# Altium PCB 核心板.PcbDoc
Units mm, origin at the board's own origin, x right, y up, seen from the top; angles counter-clockwise.
Board outline 56.5 x 81 mm, 2 copper layers (Top Layer, Bottom Layer); 12 components, 45 nets, 149 pads, 10 vias.
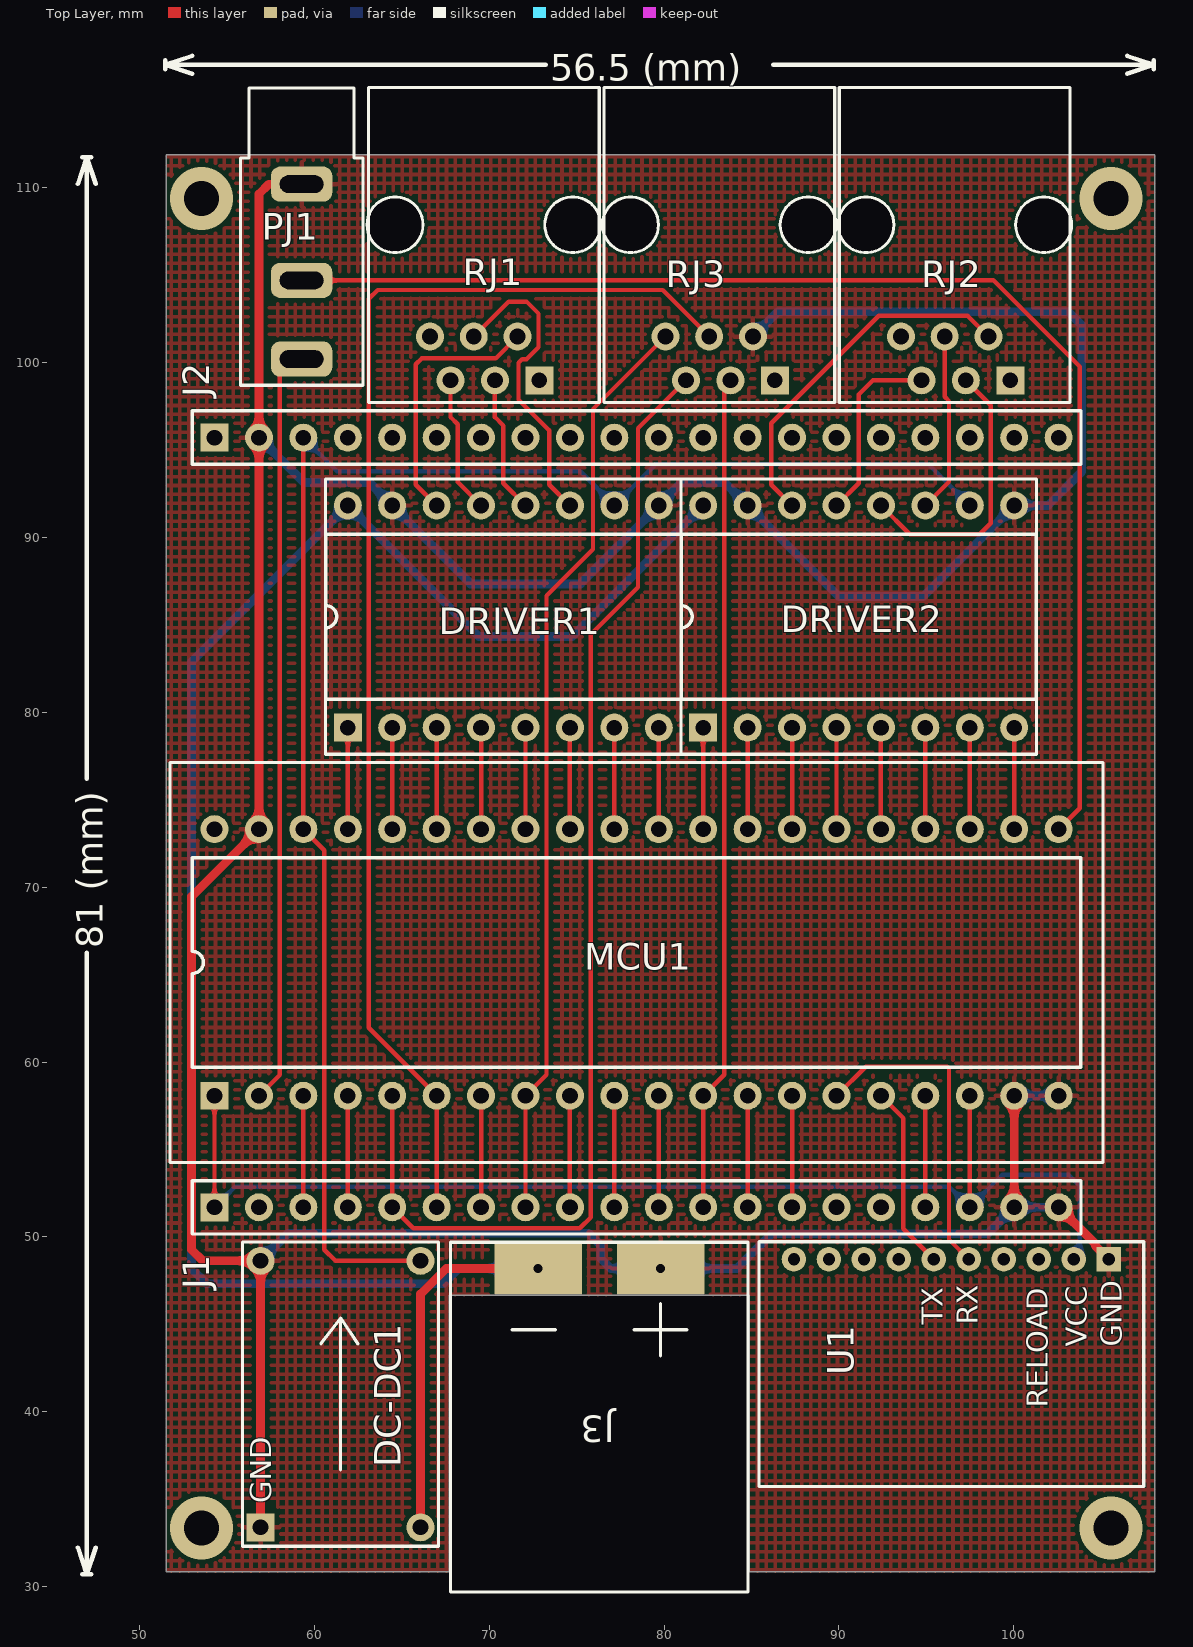
[diagram p0: Top Layer view]
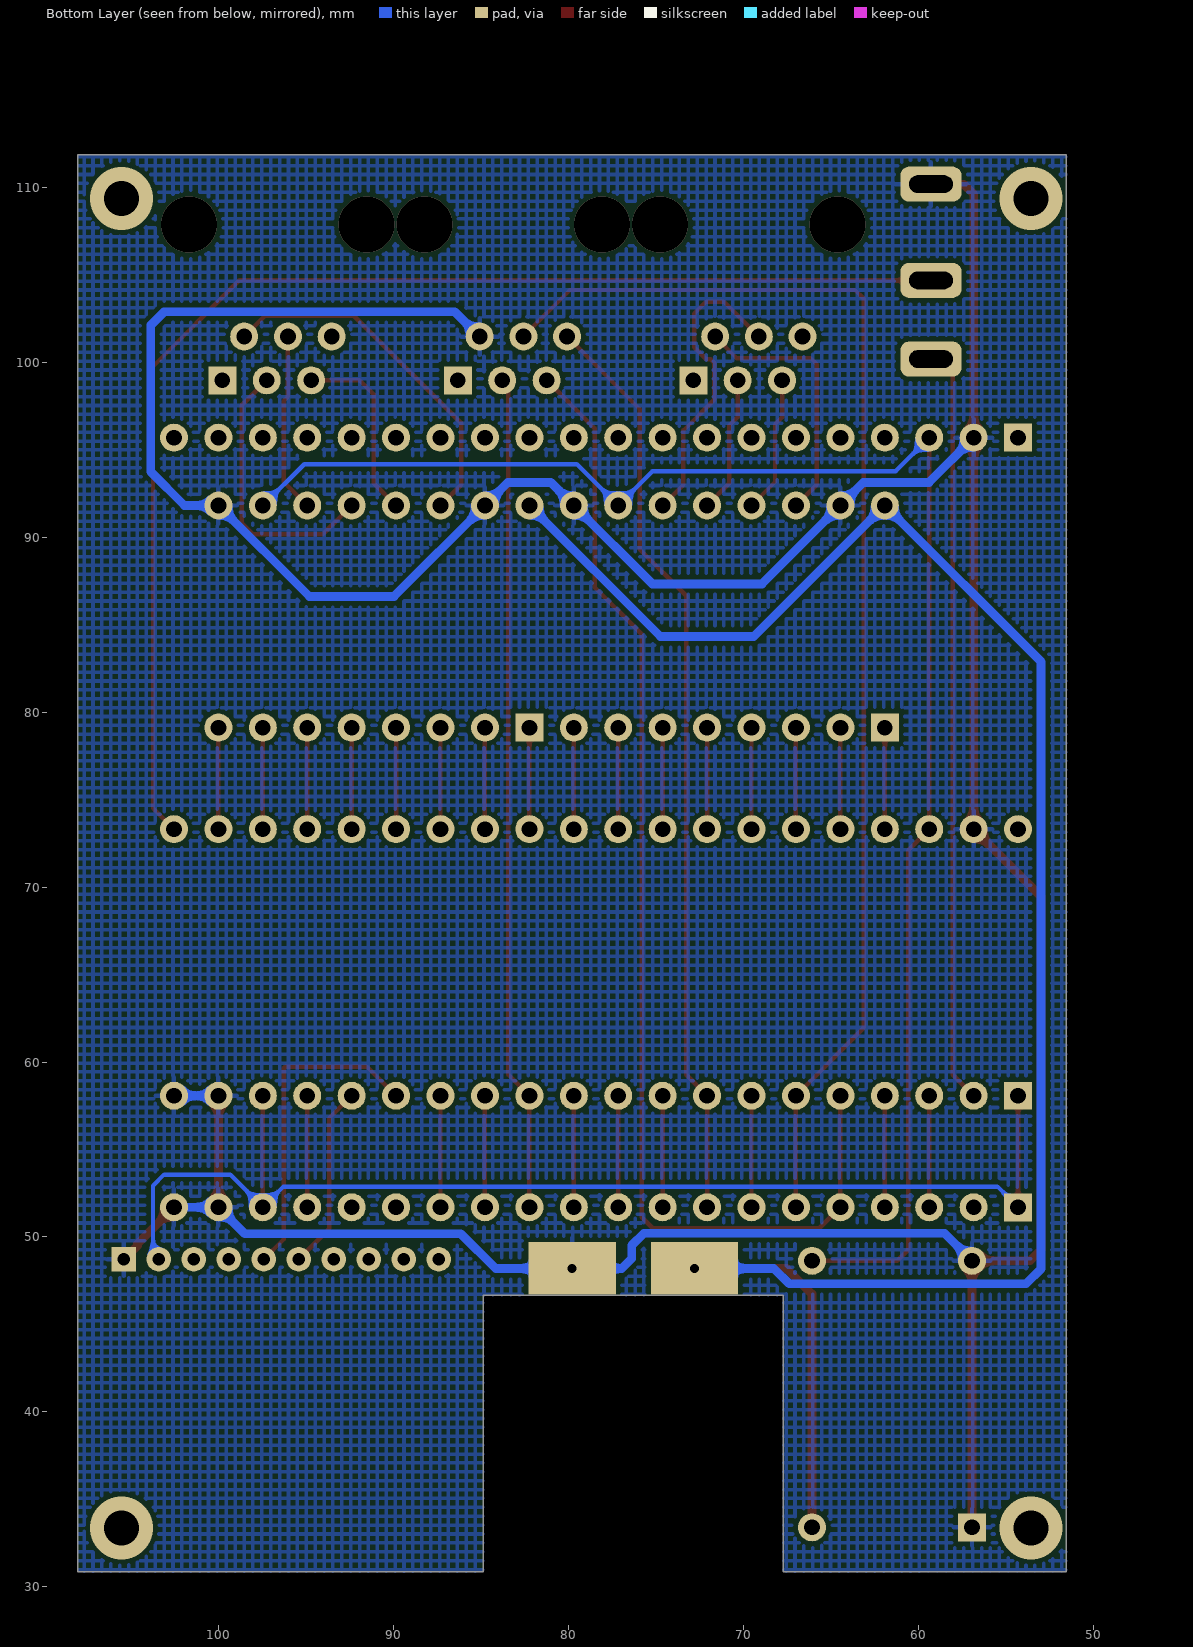
[diagram p1: Bottom Layer view, seen from below]

## Layer stack, top to bottom
Top Solder: solder mask 0.0102, Solder Resist, Dk 3.5
Top Layer: signal copper 0.0356
Dielectric 1: dielectric 0.32, FR-4, Dk 4.8
Bottom Layer: signal copper 0.0356
Bottom Solder: solder mask 0.0102, Solder Resist, Dk 3.5

## Board outline
51.55,30.875 51.55,111.875 108.05,111.875 108.05,30.875 84.875,30.875 84.875,46.675 67.725,46.675 67.725,30.875

## Design rules (kind name [scope] priority, off if disabled: settings)
Clearance [All] p1: gap=0.254
PolygonConnect [All] p1: connectstyle=Relief reliefconductorwidth=0.254 reliefentries=4 polygonreliefangle="90 Angle" airgapwidth=0.254
RoutingVias [All] p1: holewidth=0.711 width=1.27 viastyle="Through Hole" minholewidth=0.711 minwidth=1.27 maxholewidth=0.711 maxwidth=1.27
SolderMaskExpansion [All] p1: expansion=0.102
Width Width_3 [InNet('NetDC-DC1_2')] p1: maxlimit=0.5 minlimit=0.5 preferedwidth=0.5
Width Width_2 [InNet('GND')] p2: maxlimit=0.5 minlimit=0.5 preferedwidth=0.5
Width Width_1 [InNet('GND')] p3: maxlimit=0.5 minlimit=0.5 preferedwidth=0.5
Width [InNet('NetDC-DC1_1')] p4: maxlimit=0.5 minlimit=0.5 preferedwidth=0.5
30 further rules are at their usual default settings.

## Components (designator, comment, footprint, x,y, rotation, side; value= is the part's Value field where it differs from the comment)
DC-DC1 "MINI360稳压模块" MINI360 61.508,41.02 r90 top
DRIVER1 "TMC2100步进电机驱动" DIP16 61.92,79.121 r90 top
DRIVER2 "TMC2100步进电机驱动" DIP16 82.24,79.121 r90 top
J1 "20脚排插" SIP20 54.3,51.7 r90 top
J2 "20脚排插" SIP20 54.3,95.7 r90 top
J3 "XT60插座" XT60 76.3,39.7 r180 top
MCU1 "STM32C8T6最小系统" DIP40 54.3,58.075 r90 top
PJ1 "PJ_316" PJ_316 59.282,104.692 r0 top
RJ1 "RJ12插座" RJ12 72.871,98.977 r180 top
RJ2 "RJ12插座" RJ12 99.795,98.977 r180 top
RJ3 "RJ12插座" RJ12 86.333,98.977 r180 top
U1 "USR-C215" USR_C215 96.425,42.725 r90 top

## Footprints (in the part's own frame and the unit in brackets; to place one, negate y for a bottom-side part, rotate by r counter-clockwise, add the part's x,y. Pads: shape width x height; smd on the part's side, far side on the other; paste and mask are expansions set on the pad)
DIP16 [mm]
  rect 1.6x1.6 hole 0.9: 1(0,0)
  round 1.6 hole 0.9: 2(0,-2.54) 3(0,-5.08) 4(0,-7.62) 5(0,-10.16) 6(0,-12.7) 7(0,-15.24) 8(0,-17.78) 9(12.7,-17.78) 10(12.7,-15.24) 11(12.7,-12.7) 12(12.7,-10.16) 13(12.7,-7.62) 14(12.7,-5.08) 15(12.7,-2.54) 16(12.7,0)
  silkscreen extent -1.52,-19.05 14.22,1.27
DIP40 [mm]
  rect 1.6x1.6 hole 0.9: 1(0,0)
  round 1.6 hole 0.9: 2(0,-2.54) 3(0,-5.08) 4(0,-7.62) 5(0,-10.16) 6(0,-12.7) 7(0,-15.24) 8(0,-17.78) 9(0,-20.32) 10(0,-22.86) 11(0,-25.4) 12(0,-27.94) 13(0,-30.48) 14(0,-33.02) 15(0,-35.56) 16(0,-38.1) 17(0,-40.64) 18(0,-43.18) 19(0,-45.72) 20(0,-48.26) 21(15.24,-48.26) 22(15.24,-45.72) 23(15.24,-43.18) 24(15.24,-40.64) 25(15.24,-38.1) 26(15.24,-35.56) 27(15.24,-33.02) 28(15.24,-30.48) 29(15.24,-27.94) 30(15.24,-25.4) 31(15.24,-22.86) 32(15.24,-20.32) 33(15.24,-17.78) 34(15.24,-15.24) 35(15.24,-12.7) 36(15.24,-10.16) 37(15.24,-7.62) 38(15.24,-5.08) 39(15.24,-2.54) 40(15.24,0)
  silkscreen extent -3.81,-50.8 19.05,2.54
MINI360 [mm]
  rect 1.6x1.6 hole 0.9: 1(-7.62,4.572)
  round 1.6 hole 0.9: 2(-7.62,-4.572) 3(7.62,-4.572) 4(7.62,4.572)
  silkscreen extent -8.7,-5.6 8.7,5.6
PJ_316 [mm]
  rrect50% 3.5x2 hole 1 slot 2.5 at 0 deg: 1(0,5.5) 2(0,0) 3(0,-4.5)
  silkscreen extent -3.5,-6 3.5,11
RJ12 [mm]
  rect 1.6x1.6 hole 0.9: 1(0,0)
  round 1.6 hole 0.9: 2(1.25,-2.5) 3(2.54,0) 4(3.75,-2.5) 5(5.08,0) 6(6.25,-2.5)
  silkscreen extent -3.51,-16.74 9.85,1.26
SIP20 [mm]
  rect 1.6x1.6 hole 0.9: 1(0,0)
  round 1.6 hole 0.9: 2(0,-2.54) 3(0,-5.08) 4(0,-7.62) 5(0,-10.16) 6(0,-12.7) 7(0,-15.24) 8(0,-17.78) 9(0,-20.32) 10(0,-22.86) 11(0,-25.4) 12(0,-27.94) 13(0,-30.48) 14(0,-33.02) 15(0,-35.56) 16(0,-38.1) 17(0,-40.64) 18(0,-43.18) 19(0,-45.72) 20(0,-48.26)
  silkscreen extent -1.52,-49.53 1.52,1.27
USR_C215 [mm]
  rect 1.4x1.4 hole 0.7: 1(6,-9)
  round 1.4 hole 0.7: 2(6,-7) 3(6,-5) 4(6,-3) 5(6,-1) 6(6,1) 7(6,3) 8(6,5) 9(6,7) 10(6,9)
  silkscreen extent -7,-11 7,11
XT60 [mm]
  rect 5x3 hole 0.5: 1(-3.5,-8.5) 2(3.5,-8.5)
  silkscreen extent -8.5,-10 8.5,10

## Via types
v1: diameter 3.2, hole 3.2, Top Layer to Bottom Layer, 6 vias
v2: diameter 3.6, hole 2, Top Layer to Bottom Layer, 4 vias

## Nets (pads, with @x,y where several pads share a name; then routed paths per layer and width w, separated by ;. In a path a pad name is that pad's centre, name@x,y a point inside that pad or via, vN(x,y) a via of type N, cw(c..) or ccw(c..) an arc to the next point about the centre after c; other vN are vias at no path point)
GND: DC-DC1.1 DC-DC1.4 DRIVER1.9 DRIVER1.15 DRIVER2.9 DRIVER2.15 J1.19 J1.20 J2.2 J3.1 MCU1.19 MCU1.20 MCU1.39 PJ1.1 RJ3.2 U1.1 | length 232.8
  Top Layer w0.5: DC-DC1.1 DC-DC1.4 53.62,48.64 52.984,49.276 52.984,69.459 MCU1.39 J2.2 56.84,109.628 57.404,110.192 PJ1.1 ; J1.19 MCU1.19 ; J1.20 104.648,49.612 104.648,49.502 U1.1
  Bottom Layer w0.5: J2.2 59.398,93.142 63.139,93.142 DRIVER1.15 68.942,87.339 75.218,87.339 DRIVER1.9 81.021,93.142 83.459,93.142 DRIVER2.15 89.987,86.614 94.813,86.614 DRIVER2.9 101.956,91.821 103.886,93.751 103.886,102.133 103.124,102.895 86.501,102.895 RJ3.2 ; DC-DC1.4 58.512,50.216 75.692,50.216 76.387,49.521 76.387,48.768 76.955,48.2 J3.1 84.166,48.2 86.157,50.19 98.51,50.19 J1.19 J1.20 ; MCU1.19 MCU1.20
NetDC-DC1_2: DC-DC1.2 DRIVER1.16 DRIVER2.16 J3.2 | length 115.1
  Top Layer w0.5: DC-DC1.2 66.08,46.736 67.544,48.2 J3.2
  Bottom Layer w0.5: J3.2 68.266,48.2 67.386,47.32 53.848,47.32 52.984,48.184 52.984,82.885 DRIVER1.16 69.413,84.328 74.747,84.328 DRIVER2.16
NetDC-DC1_3: DC-DC1.3 DRIVER1.10 DRIVER2.10 J2.3 MCU1.38 | length 94.3
  Top Layer w0.254: J2.3 MCU1.38 60.579,72.116 60.579,49.276 61.215,48.64 DC-DC1.3
  Bottom Layer w0.254: J2.3 61.303,93.777 75.204,93.777 DRIVER1.10 79.522,94.183 95.118,94.183 DRIVER2.10
NetDRIVER1_1: DRIVER1.1 MCU1.37 | length 5.8
  Top Layer w0.254: MCU1.37 DRIVER1.1
NetDRIVER1_2: DRIVER1.2 MCU1.36 | length 5.8
  Top Layer w0.254: MCU1.36 DRIVER1.2
NetDRIVER1_3: DRIVER1.3 MCU1.35 | length 5.8
  Top Layer w0.254: MCU1.35 DRIVER1.3
NetDRIVER1_4: DRIVER1.4 MCU1.34 | length 5.8
  Top Layer w0.254: MCU1.34 DRIVER1.4
NetDRIVER1_5: DRIVER1.5 MCU1.33 | length 5.8
  Top Layer w0.254: MCU1.33 DRIVER1.5
NetDRIVER1_6: DRIVER1.6 MCU1.32 | length 5.8
  Top Layer w0.254: MCU1.32 DRIVER1.6
NetDRIVER1_7: DRIVER1.7 MCU1.31 | length 5.8
  Top Layer w0.254: MCU1.31 DRIVER1.7
NetDRIVER1_8: DRIVER1.8 MCU1.30 | length 5.8
  Top Layer w0.254: MCU1.30 DRIVER1.8
NetDRIVER1_11: DRIVER1.11 RJ1.4 | length 17.6
  Top Layer w0.254: RJ1.4 71.124,103.48 72.136,103.48 72.822,102.794 72.822,100.863 72.136,100.178 71.882,100.178 71.679,99.974 71.679,97.866 73.431,96.114 73.431,93.01 DRIVER1.11
NetDRIVER1_12: DRIVER1.12 RJ1.3 | length 7.9
  Top Layer w0.254: RJ1.3 70.331,96.876 70.815,96.391 70.815,93.086 DRIVER1.12
NetDRIVER1_13: DRIVER1.13 RJ1.5 | length 7.9
  Top Layer w0.254: RJ1.5 67.791,96.876 68.199,96.468 68.199,93.162 DRIVER1.13
NetDRIVER1_14: DRIVER1.14 RJ1.2 | length 15
  Top Layer w0.254: DRIVER1.14 65.811,93.01 65.811,99.898 66.142,100.228 70.372,100.228 RJ1.2
NetDRIVER2_1: DRIVER2.1 MCU1.29 | length 5.8
  Top Layer w0.254: MCU1.29 DRIVER2.1
NetDRIVER2_2: DRIVER2.2 MCU1.28 | length 5.8
  Top Layer w0.254: MCU1.28 DRIVER2.2
NetDRIVER2_3: DRIVER2.3 MCU1.27 | length 5.8
  Top Layer w0.254: MCU1.27 DRIVER2.3
NetDRIVER2_4: DRIVER2.4 MCU1.26 | length 5.8
  Top Layer w0.254: MCU1.26 DRIVER2.4
NetDRIVER2_5: DRIVER2.5 MCU1.25 | length 5.8
  Top Layer w0.254: MCU1.25 DRIVER2.5
NetDRIVER2_6: DRIVER2.6 MCU1.24 | length 5.8
  Top Layer w0.254: MCU1.24 DRIVER2.6
NetDRIVER2_7: DRIVER2.7 MCU1.23 | length 5.8
  Top Layer w0.254: MCU1.23 DRIVER2.7
NetDRIVER2_8: DRIVER2.8 MCU1.22 | length 5.8
  Top Layer w0.254: MCU1.22 DRIVER2.8
NetDRIVER2_11: DRIVER2.11 RJ2.4 | length 10.3
  Top Layer w0.254: DRIVER2.11 96.291,93.172 96.291,97.79 96.045,98.036 RJ2.4
NetDRIVER2_12: DRIVER2.12 RJ2.3 | length 16
  Top Layer w0.254: DRIVER2.12 94.051,90.17 98.044,90.17 98.679,90.805 98.679,97.553 RJ2.3
NetDRIVER2_13: DRIVER2.13 RJ2.5 | length 10.8
  Top Layer w0.254: DRIVER2.13 91.135,93.096 91.135,98.164 91.948,98.977 RJ2.5
NetDRIVER2_14: DRIVER2.14 RJ2.2 | length 20.6
  Top Layer w0.254: DRIVER2.14 86.131,93.01 86.131,96.52 92.278,102.667 97.355,102.667 RJ2.2
NetJ1_3: J1.3 MCU1.3 | length 6.4
  Top Layer w0.254: J1.3 MCU1.3
NetJ1_4: J1.4 MCU1.4 | length 6.4
  Top Layer w0.254: J1.4 MCU1.4
NetJ1_5: J1.5 MCU1.5 RJ3.5 | length 68.6
  Top Layer w0.254: MCU1.5 J1.5 65.665,50.495 75.184,50.495 75.819,51.13 75.819,84.455 78.511,87.147 78.511,96.235 RJ3.5
NetJ1_6: J1.6 MCU1.6 RJ3.4 | length 74.3
  Top Layer w0.254: J1.6 MCU1.6 63.119,61.956 63.119,103.632 63.627,104.14 79.92,104.14 RJ3.4
NetJ1_7: J1.7 MCU1.7 | length 6.4
  Top Layer w0.254: J1.7 MCU1.7
NetJ1_8: J1.8 MCU1.8 RJ3.6 | length 53.1
  Top Layer w0.254: J1.8 MCU1.8 73.279,59.274 73.279,86.665 75.939,89.325 75.939,97.333 RJ3.6
NetJ1_9: J1.9 MCU1.9 | length 6.4
  Top Layer w0.254: J1.9 MCU1.9
NetJ1_10: J1.10 MCU1.10 | length 6.4
  Top Layer w0.254: J1.10 MCU1.10
NetJ1_11: J1.11 MCU1.11 | length 6.4
  Top Layer w0.254: J1.11 MCU1.11
NetJ1_12: J1.12 MCU1.12 RJ3.3 | length 48.1
  Top Layer w0.254: J1.12 MCU1.12 83.439,59.274 83.439,98.977 RJ3.3
NetJ1_13: J1.13 MCU1.13 | length 6.4
  Top Layer w0.254: J1.13 MCU1.13
NetJ1_14: J1.14 MCU1.14 | length 6.4
  Top Layer w0.254: J1.14 MCU1.14
NetJ1_17: J1.17 MCU1.17 | length 6.4
  Top Layer w0.254: J1.17 MCU1.17
NetMCU1_2: MCU1.2 PJ1.3 | length 43.9
  Top Layer w0.254: MCU1.2 58.039,59.274 58.039,100.192 PJ1.3
NetMCU1_15: MCU1.15 U1.5 | length 18.5
  Top Layer w0.254: MCU1.15 91.526,59.741 96.19,59.741 96.291,59.639 96.291,49.859 U1.5
NetMCU1_16: MCU1.16 U1.6 | length 10.6
  Top Layer w0.254: MCU1.16 93.675,56.8 93.675,50.475 U1.6
NetMCU1_21: MCU1.21 PJ1.2 | length 73.5
  Top Layer w0.254: PJ1.2 98.831,104.692 103.759,99.764 103.759,74.514 MCU1.21
VCC: J1.1 J1.18 MCU1.1 MCU1.18 U1.2 | length 68.8
  Top Layer w0.254: J1.1 MCU1.1 ; J1.18 MCU1.18
  Bottom Layer w0.254: J1.1 55.483,52.883 96.297,52.883 J1.18 99.349,53.569 103.124,53.569 103.759,52.934 103.759,48.725 U1.2
pads on no net: J1.2 J1.15 J1.16 J2.1 J2.4 J2.5 J2.6 J2.7 J2.8 J2.9 J2.10 J2.11 J2.12 J2.13 J2.14 J2.15 J2.16 J2.17 J2.18 J2.19 J2.20 MCU1.40 RJ1.1 RJ1.6 RJ2.1 RJ2.6 RJ3.1 U1.3 U1.4 U1.7 U1.8 U1.9 U1.10
copper on no net:
  other v1: 64.621,107.877 74.771,107.877 78.083,107.877 88.233,107.877 91.545,107.877 101.695,107.877
  other v2: 53.55,33.375 105.55,33.375 53.55,109.375 105.55,109.375

## Polygon pours and split planes (outlines as drawn)
GND on Top Layer "Top Layer-No Net" (hatched 90Degree grid 0.508 track 0.203, pour order 6): 51.601,111.8 107.999,111.8 107.999,30.9 84.9,30.9 84.899,46.7 67.7,46.7 67.7,30.9 51.601,30.9
GND on Bottom Layer "Top Layer-No Net" (hatched 90Degree grid 0.508 track 0.203, pour order 8): 51.587,111.8 108,111.8 108,30.9 84.9,30.9 84.9,46.7 67.7,46.7 67.7,30.9 51.587,30.913

## Silkscreen, mask and mechanical layers (free items; w line width, h text height)
Top Overlay:
  lines w0.254: 46.492,32.247 47,30.723 ; 46.492,110.199 47,111.723 ; 46.746,30.723 47.254,30.723 ; 46.746,111.723 47.254,111.723 ; 47,66.246 47,30.723 ; 47,76.2 47,111.723 ; 47.508,32.247 47,30.723 ; 47.508,110.199 47,111.723 ; 51.496,116.76 51.496,117.268 ; 53.02,116.506 51.496,117.014 ; 53.02,117.522 51.496,117.014 ; 73.246,117.014 51.496,117.014 ; 86.247,117.014 107.996,117.014 ; 106.472,116.506 107.996,117.014 ; 106.472,117.522 107.996,117.014 ; 107.996,116.76 107.996,117.268
  text "56.5 (mm)" at 73.5,116.1 h1.52
  text "81 (mm)" at 47.914,66.5 h1.52 r90
Mechanical 1:
  the board outline again, w0.178

## Text inside footprints (layer, text, board x,y; h text height)
DC-DC1: Top Overlay "GND" at 57.558,34.77 h1.2 r90
U1: Top Overlay "RX" at 97.925,44.975 h1.2 r90; Top Overlay "TX" at 95.925,44.975 h1.2 r90; Top Overlay "RELOAD" at 101.925,40.225 h1.2 r90; Top Overlay "VCC" at 104.175,43.725 h1.2 r90; Top Overlay "GND" at 106.175,43.725 h1.2 r90